# Altium PCB Archer.PcbDoc
Units mm, origin at the board's own origin, x right, y up, seen from the top; angles counter-clockwise.
Board outline 74.75 x 26.75 mm, 2 copper layers (Top Layer, Bottom Layer), stack 1.671 mm thick; 61 components, 43 nets, 220 pads, 46 vias.
Unrouted connection lines stored in the file: 3.
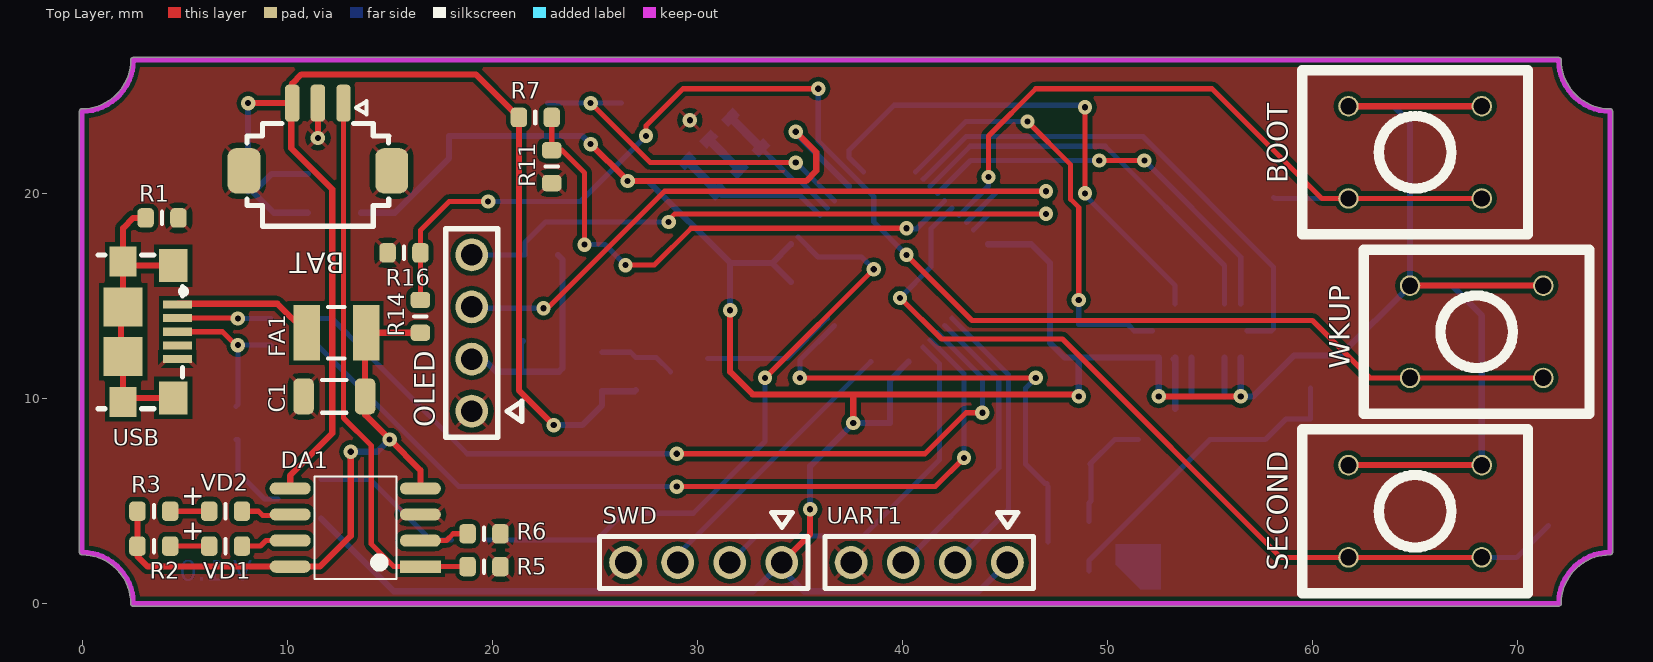
[diagram p0: Top Layer view]
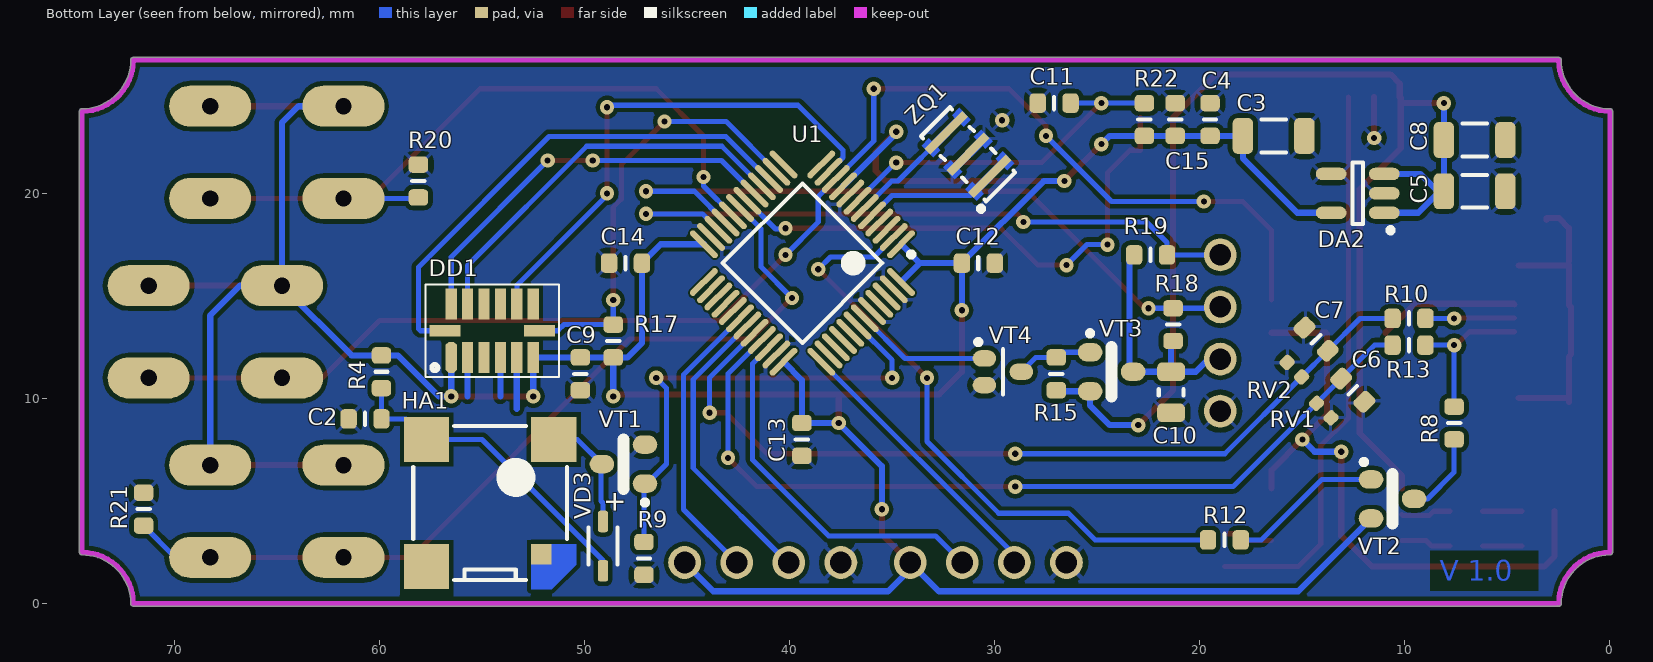
[diagram p1: Bottom Layer view, seen from below]
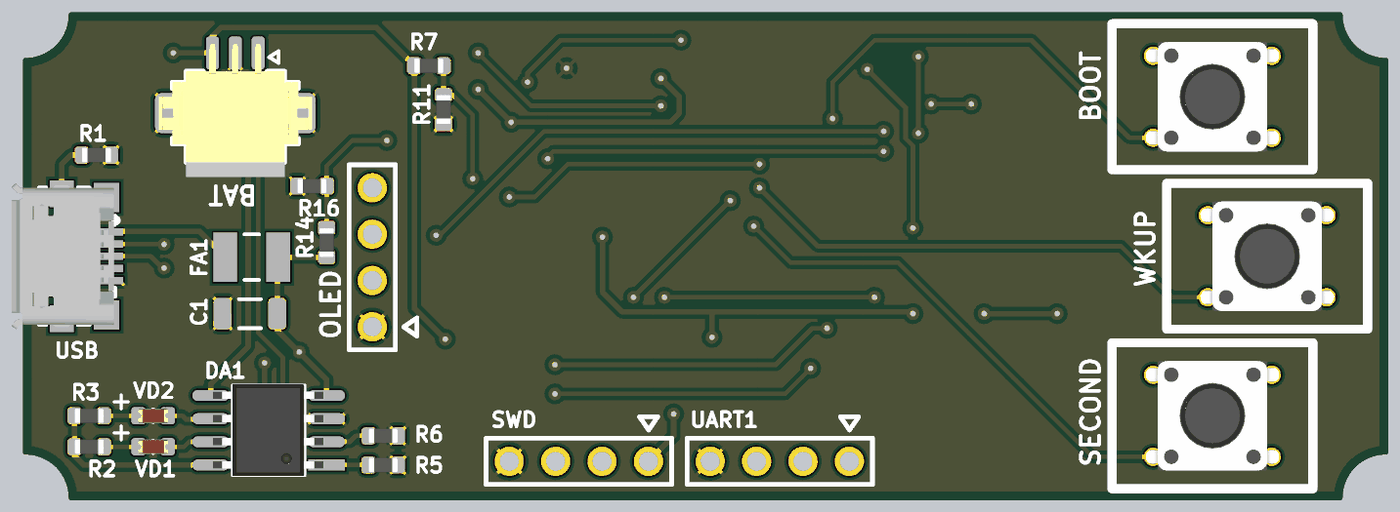
[diagram p2: 3D render of the assembled board from above, using the file's embedded part models]
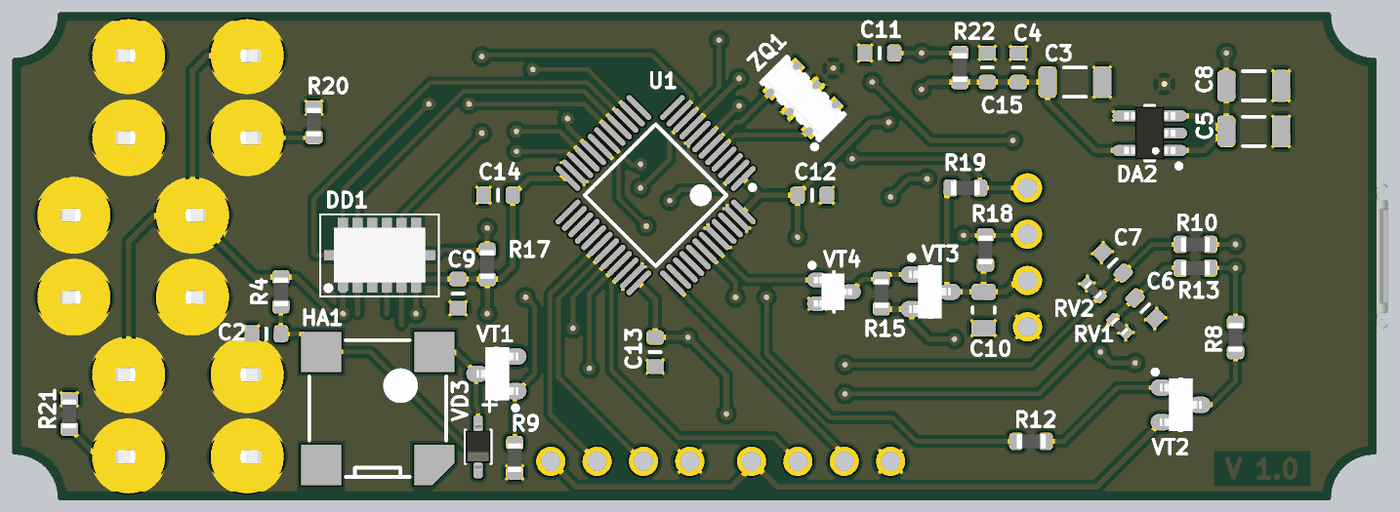
[diagram p3: 3D render of the assembled board from below, using the file's embedded part models]

## Layer stack, top to bottom
Top Solder: solder mask 0.0102, Solder Resist, Dk 3.5
Top Layer: signal copper 0.0356
Dielectric 1: dielectric 1.6, FR-4, Dk 4.8
Bottom Layer: signal copper 0.0356
Bottom Solder: solder mask 0.0102, Solder Resist, Dk 3.5

## Board outline
-0.127,2.501 ccw(c0,2.5) 0,2.373 cw(c0,0) 2.373,0 ccw(c2.5,0) 2.55,-0.117 ccw(c2.6,0) 2.6,-0.127 72,-0.127 ccw(c72,0) 72.127,0 cw(c74.5,0) 74.5,2.373 ccw(c74.5,2.5) 74.627,2.5 74.627,24 ccw(c74.5,24) 74.5,24.127 cw(c74.5,26.5) 72.127,26.5 ccw(c72,26.5) 72,26.627 2.5,26.627 ccw(c2.5,26.5) 2.373,26.5 cw(c0,26.5) 0,24.127 ccw(c0,24) -0.127,24

## Design rules (kind name [scope] priority, off if disabled: settings)
Clearance Clearance_U1_0.1mm [(ObjectKind = 'Pad') And (Component = 'U1')] p1: gap=0.1
Clearance Clearance_All_0.22mm [All] p2: gap=0.22
Clearance [All] p3: gap=0.2
ComponentClearance [All] p1 off: gap=0.05 collisioncheckmode=3 verticalgap=0.05 showdistances=FALSE
Height [All] p1 off: minheight=0 maxheight=25.4 prefheight=12
PolygonConnect [All] p1: connectstyle=Relief reliefconductorwidth=0.18 reliefentries=4 polygonreliefangle="45 Angle" airgapwidth=0.254
RoutingVias [All] p1: holewidth=0.3 width=0.7 viastyle="Through Hole" minholewidth=0.3 minwidth=0.7 maxholewidth=0.3 maxwidth=0.7
SolderMaskExpansion [All] p1: expansion=0.102
Width Width_PowerClass_0.3mm [InNetClass('PowerClass')] p1: maxlimit=0.3 minlimit=0.3 preferedwidth=0.3 minimp=50.000000 maximp=50.000000 favimp=50.000000
Width [All] p2: maxlimit=0.25 minlimit=0.25 preferedwidth=0.25 minimp=50.000000 maximp=50.000000 favimp=50.000000
28 further rules are at their usual default settings.

## Classes and differential pairs
net class PowerClass: GND NetSHLD V3.3 VBAT VBUS VCC VOLED

## Components (designator, comment, footprint, x,y, rotation, side; value= is the part's Value field where it differs from the comment)
BAT "Hirose DF13A-3P-1.25H(20)" DF13A-3P-1.25H 11.5,21.1 r180 top
BOOT "ModelName" "Button Switronic Industrial 0650HIM-130G-G high" 65,22 r180 top
C1 "чип 1206 10uF/50V," CAPC3216X135(1206) 12.3,10.1 r180 top
C2 "чип 0603 0.1uF/50V," CAPC1608X50(0603) 60.7,9 r180 bottom
C3 "чип 1206 10uF/50V," CAPC3216X135(1206) 16.4,22.8 r180 bottom
C4 "чип 0603 1uF/50V," CAPC1608X50(0603) 19.5,23.6 r270 bottom
C5 "чип 1206 10uF/50V," CAPC3216X135(1206) 6.6,20.1 r180 bottom
C6 "чип 0603 3.9pF/50V," CAPC1608X50(0603) 12.541,10.4 r225 bottom
C7 "чип 0603 3.9pF/50V," CAPC1608X50(0603) 14.328,12.887 r225 bottom
C8 "чип 1206 10uF/50V," CAPC3216X135(1206) 6.6,22.6 r180 bottom
C9 "чип 0603 0.1uF/50V," CAPC1608X50(0603) 50.2,11.2 r90 bottom
C10 "чип 0805 10uF/50V," CAPC2012X135(0805) 21.4,10.3 r90 bottom
C11 "чип 0603 0.1uF/50V," CAPC1608X50(0603) 27.1,24.4 r0 bottom
C12 "чип 0603 0.1uF/50V," CAPC1608X50(0603) 30.8,16.6 r0 bottom
C13 "чип 0603 0.1uF/50V," CAPC1608X50(0603) 39.4,8 r90 bottom
C14 "чип 0603 0.1uF/50V," CAPC1608X50(0603) 48,16.6 r180 bottom
C15 "чип 0603 0.1uF/50V," CAPC1608X50(0603) 21.2,23.6 r270 bottom
DA1 "ModelName" "Microchip NanJing Linear Battery Charger TP4056 SOP-8" 16.5,1.8 r180 top
DA2 "TPS78233DDCR(SOT23-5)" SOT95P285X130-5N(SOT23-5) 12.3,20 r0 bottom
DD1 "ModelName" "Microchip DigitalAccelerometer AnalogDevices ADXL345 LGA-14" 52,11.8 r90 bottom
FA1 "F1210 2A/" RESC1210N 12.4,13.2 r0 top
HA1 "AST7525MATRQ" AST7525MATRQ 54.6,4.9 r180 bottom
OLED "DS1021-1x4" HDRV4P254_1x4 19,17 r270 top
R1 "чип 0603 0 5%" RESC1608X45(0603) 3.9,18.8 r180 top
R2 "чип 0603 1k 5%" RESC1608X45(0603) 3.5,2.8 r180 top
R3 "чип 0603 1k 5%" RESC1608X45(0603) 3.5,4.5 r180 top
R4 "чип 0603 0 5%" RESC1608X45(0603) 59.9,11.3 r270 bottom
R5 "чип 0603 10k 5%" RESC1608X45(0603) 19.6,1.8 r180 top
R6 "чип 0603 2.8k 5%" RESC1608X45(0603) 19.6,3.4 r180 top
R7 "чип 0603 10k 5%" RESC1608X45(0603) 22.1,23.7 r180 top
R8 "чип 0603 1k 5%" RESC1608X45(0603) 7.6,8.8 r90 bottom
R9 "чип 0603 10k 5%" RESC1608X45(0603) 47.1,2.2 r90 bottom
R10 "чип 0603 10 5%" RESC1608X45(0603) 9.8,13.9 r180 bottom
R11 "чип 0603 20k 5%" RESC1608X45(0603) 22.9,21.3 r90 top
R12 "чип 0603 1k 5%" RESC1608X45(0603) 18.8,3.1 r180 bottom
R13 "чип 0603 10 5%" RESC1608X45(0603) 9.8,12.6 r180 bottom
R14 "чип 0603 5.9k 5%" RESC1608X45(0603) 16.5,14 r270 top
R15 "чип 0603 30k 5%" RESC1608X45(0603) 27,11.2 r90 bottom
R16 "чип 0603 10k 5%" RESC1608X45(0603) 15.7,17.1 r0 top
R17 "чип 0603 10k 5%" RESC1608X45(0603) 48.6,12.8 r270 bottom
R18 "чип 0603 1k 5%" RESC1608X45(0603) 21.3,13.6 r90 bottom
R19 "чип 0603 1k 5%" RESC1608X45(0603) 22.4,17 r180 bottom
R20 "чип 0603 10k 5%" RESC1608X45(0603) 58.1,20.6 r270 bottom
R21 "чип 0603 10k 5%" RESC1608X45(0603) 71.5,4.6 r270 bottom
R22 "чип 0603 1k 5%" RESC1608X45(0603) 22.7,23.6 r270 bottom
RV1 "B72590T7900V060" RESC1005X35(0402) 13.956,9.41 r45 bottom
RV2 "B72590T7900V060" RESC1005X35(0402) 15.389,11.402 r225 bottom
SECOND "ModelName" "Button Switronic Industrial 0650HIM-130G-G high" 65,4.5 r180 top
SWD "DS1021-1x4" HDRV4P254_1x4 26.5,2 r0 top
U1 "STM32F103C8T6" LQFP48_N 39.374,16.598 r315 bottom
UART1 "DS1021-1x4" HDRV4P254_1x4 37.5,2 r0 top
USB "1981568-1" "USB MICRO-B" 2,13.25 r270 top
VD1 "чип 0603 LED (RED)" LEDC1608X80N(0603)_red 7,2.8 r180 top
VD2 "чип 0603 LED (RED)" LEDC1608X80N(0603)_red 7,4.5 r180 top
VD3 "1N4148WS (SOD323)" SOD2514X110N(SOD323) 49.1,2.8 r90 bottom
VT1 "IRLML0030TRPBF (SOT-23)" "SOT95P230-3N (SOT-23) num" 48.1,6.8 r0 bottom
VT2 "BC807 (SOT-23)" "SOT95P230-3N (SOT-23)" 10.6,5.1 r180 bottom
VT3 "IRLML6402TRPBF (SOT-23)" "SOT95P230-3N (SOT-23) num" 24.3,11.3 r180 bottom
VT4 "MUN5211T1G (SOT-323)" "SOT65P200X110-3N (SOT323)_NUM" 29.6,11.3 r180 bottom
WKUP "ModelName" "Button Switronic Industrial 0650HIM-130G-G high" 68,13.25 r180 top
ZQ1 "CSTCR4M00G53Z-B0(4 MHz)" "XTAL450X200X120 (CSTCR)" 31.3,21.9 r45 bottom

## Footprints (in the part's own frame and the unit in brackets; to place one, negate y for a bottom-side part, rotate by r counter-clockwise, add the part's x,y. Pads: shape width x height; smd on the part's side, far side on the other; paste and mask are expansions set on the pad)
AST7525MATRQ [mm]
  rect 2.2x2.2 smd: 1(-3.1,3.1) 2(3.1,3.1) 3(-3.1,-3.1)
  rect 1x1 smd: 4(2.5,-2.5)
  Top Layer region: 2,-2 2,-4.2 3,-4.2 4.2,-3 4.2,-2
  silkscreen extent -3.75,-3.75 3.75,3.75, body extent -3.75,-3.75 3.75,3.75, height 2.5
"Button Switronic Industrial 0650HIM-130G-G high" [mm] "http://www.chipdip.ru/product/0650him-130g-g-tc-0103-ts-a2ps-130/"
  round 1 / inner oval 3x2 / far side oval 4x2 hole 0.8: 1(-3.25,2.25) 2(3.25,2.25) 3(3.25,-2.25) 4(-3.25,-2.25)
  silkscreen extent -5.5,-4 5.5,4, body extent -3.99,-3 3.99,3, height 12.7
CAPC1608X50(0603) [mm]
  rrect50% 0.8x0.95 smd paste-0.025: 1(-0.8,0) 2(0.8,0)
  silkscreen extent 0,-0.3 0,0.3, body extent -0.8,-0.4 0.8,0.4, height 0.5
CAPC2012X135(0805) [mm]
  rrect50% 0.9x1.35 smd paste-0.025: 1(-1,0) 2(1,0)
  silkscreen extent -0.15,-0.6 0.15,0.6, body extent -1,-0.6 1,0.6, height 1.35
CAPC3216X135(1206) [mm]
  rrect50% 1x1.75 smd paste-0.025: 1(-1.5,0) 2(1.5,0)
  silkscreen extent -0.6,-0.8 0.6,0.8, body extent -1.6,-0.8 1.6,0.8, height 1.35
DF13A-3P-1.25H [mm] "1.25mm Pitch Crimping Connector"
  rrect50% 0.7x1.8 smd: 1(-1.25,-3.3) 2(0,-3.3) 3(1.25,-3.3)
  rrect50% 1.6x2.2 smd: SH1(-3.6,0) SH2(3.6,0)
  silkscreen extent -3.45,-3.4 3.45,2.7, body extent -4.2,-3.8 4.2,3.5, height 3.61
HDRV4P254_1x4 [mm] "PLS4"
  round 1.6 hole 1.05: 1(7.62,0) 2(5.08,0) 3(2.54,0) 4(0,0)
  silkscreen extent -1.27,-1.27 8.89,2.45
LEDC1608X80N(0603)_red [mm]
  rrect50% 0.8x0.95 smd: A(0.8,0) C(-0.8,0)
  silkscreen extent 0,-0.35 0,0.35, body extent -0.81,-0.4 0.81,0.4, height 0.6
LQFP48_N [mm] "Thin QFP, 48-Leads, Body 7x7mm, Pitch 0.5mm, IPC Medium Density"
  oval 1.8x0.3 smd: 1(-4.05,2.75) 2(-4.05,2.25) 3(-4.05,1.75) 4(-4.05,1.25) 5(-4.05,0.75) 6(-4.05,0.25) 7(-4.05,-0.25) 8(-4.05,-0.75) 9(-4.05,-1.25) 10(-4.05,-1.75) 11(-4.05,-2.25) 12(-4.05,-2.75) 25(4.05,-2.75) 26(4.05,-2.25) 27(4.05,-1.75) 28(4.05,-1.25) 29(4.05,-0.75) 30(4.05,-0.25) 31(4.05,0.25) 32(4.05,0.75) 33(4.05,1.25) 34(4.05,1.75) 35(4.05,2.25) 36(4.05,2.75)
  oval 0.3x1.8 smd: 13(-2.75,-4.05) 14(-2.25,-4.05) 15(-1.75,-4.05) 16(-1.25,-4.05) 17(-0.75,-4.05) 18(-0.25,-4.05) 19(0.25,-4.05) 20(0.75,-4.05) 21(1.25,-4.05) 22(1.75,-4.05) 23(2.25,-4.05) 24(2.75,-4.05) 37(2.75,4.05) 38(2.25,4.05) 39(1.75,4.05) 40(1.25,4.05) 41(0.75,4.05) 42(0.25,4.05) 43(-0.25,4.05) 44(-0.75,4.05) 45(-1.25,4.05) 46(-1.75,4.05) 47(-2.25,4.05) 48(-2.75,4.05)
  silkscreen extent -4.17,-2.75 2.75,3.57, body extent -3.5,-3.5 3.5,3.5, height 1.6
"Microchip DigitalAccelerometer AnalogDevices ADXL345 LGA-14" [mm]
  oct 1.5x0.55 smd mask+0: 1(0.2,4.5)
  rect 1.5x0.55 smd mask+0: 2(0.2,3.7) 3(0.2,2.9) 4(0.2,2.1) 5(0.2,1.3) 6(0.2,0.5) 8(2.8,0.5) 9(2.8,1.3) 10(2.8,2.1) 11(2.8,2.9) 12(2.8,3.7) 13(2.8,4.5)
  rect 0.55x1.5 smd mask+0: 7(1.5,0.2) 14(1.5,4.8)
  silkscreen extent -0.75,-0.75 3.75,5.75, body extent 0.01,0 3.01,5, height 1.03
"Microchip NanJing Linear Battery Charger TP4056 SOP-8" [mm]
  rect 2x0.6 smd: 1(0,0)
  oval 2x0.6 smd: 2(0,-1.27) 3(0,-2.54) 4(0,-3.81) 5(6.35,-3.81) 6(6.35,-2.54) 7(6.35,-1.27) 8(6.35,0)
  silkscreen extent 1.18,-4.4 5.18,0.6, body extent 0.18,-4.42 6.22,0.6, height 1.6
RESC1005X35(0402) [mm]
  rrect50% 0.6x0.65 smd paste-0.025: 1(-0.5,0) 2(0.5,0)
  body extent -0.5,-0.25 0.5,0.25, height 0.38
RESC1210N [mm] "Chip Resistor, Body 3.2x2.5mm, IPC Medium Density"
  rect 1.3x2.7 smd: 1(-1.45,0) 2(1.45,0)
  silkscreen extent -0.4,-1.25 0.4,1.25, body extent -1.68,-1.32 1.68,1.32, height 0.71
RESC1608X45(0603) [mm]
  rrect50% 0.8x0.95 smd paste-0.025: 1(-0.8,0) 2(0.8,0)
  silkscreen extent 0,-0.3 0,0.3, body extent -0.8,-0.4 0.8,0.4, height 0.5
SOD2514X110N(SOD323) [mm]
  rrect50% 1.05x0.5 smd: A(1.2,0) C(-1.2,0)
  silkscreen extent -0.9,-0.7 0.9,0.7, body extent -1.3,-0.67 1.3,0.68, height 1.1
"SOT65P200X110-3N (SOT323)_NUM" [mm]
  oval 1.15x0.8 smd: 1(-0.9,0.65) 2(-0.9,-0.65) 3(0.9,0)
  silkscreen extent -1.33,-1.1 0,1.57, body extent -1.1,-1 1,1, height 0.95
"SOT95P230-3N (SOT-23)" [mm]
  oval 1.2x0.9 smd: b(-1.05,0.95) c(1.05,0) e(-1.05,-0.95)
  silkscreen extent -1.52,-1.2 0,1.92, body extent -1.15,-1.45 1.15,1.45, height 1
"SOT95P230-3N (SOT-23) num" [mm]
  oval 1.2x0.9 smd: 1(-1.05,0.95) 2(-1.05,-0.95) 3(1.05,0)
  silkscreen extent -1.17,-1.2 0,2, body extent -1.2,-1.45 1.1,1.45, height 1
SOT95P285X130-5N(SOT23-5) [mm]
  oval 1.5x0.6 smd: 1(-1.295,0.95) 2(-1.295,0) 3(-1.295,-0.95) 4(1.295,-0.95) 5(1.295,0.95)
  silkscreen extent -1.72,-1.5 0.25,1.92, body extent -1.4,-1.45 1.4,1.45, height 1.45
"USB MICRO-B" [mm] "Micro USB B Tyco  1981568-1"
  rect 0.4x1.4 smd: 1(-1.325,2.65) 2(-0.675,2.65) 3(0,2.65) 4(0.675,2.65) 5(1.325,2.65)
  rect 1.45x1.3 smd: SHLD(-3.425,0) SHLD(3.425,0)
  rect 1.6x1.4 smd: SHLD(-3.225,2.45) SHLD(3.225,2.45)
  rect 1.9x1.9 smd: SHLD(-1.2,0) SHLD(1.2,0)
  silkscreen extent -3.75,-1.22 3.75,3.12, body extent -4,-2.75 4,2.85, height 2.79
"XTAL450X200X120 (CSTCR)" [mm] "Ceramic Resonators CSTCR_G15C"
  rect 0.4x2.6 smd: 1(-1.5,0) 2(0,0) 3(1.5,0)
  Top Layer region: -1.9,1.3 -1.9,0.8 -1.7,0.8 -1.7,-0.8 -1.9,-0.8 -1.9,-1.3 -1.1,-1.3 -1.1,-0.8 -1.3,-0.8 -1.3,0.8 -1.1,0.8 -1.1,1.3
  Top Layer region: -0.4,1.3 -0.4,0.8 -0.2,0.8 -0.2,-0.8 -0.4,-0.8 -0.4,-1.3 0.4,-1.3 0.4,-0.8 0.2,-0.8 0.2,0.8 0.4,0.8 0.4,1.3
  Top Layer region: 1.1,1.3 1.1,0.8 1.3,0.8 1.3,-0.8 1.1,-0.8 1.1,-1.3 1.9,-1.3 1.9,-0.8 1.7,-0.8 1.7,0.8 1.9,0.8 1.9,1.3
  silkscreen extent -2.37,-1 2.25,1.47, body extent -2.25,-1 2.25,1, height 1.15

## Part data
BAT: library part DF13C-3P-1.25_(**), "Crimping Connector 3p"
BOOT SECOND WKUP: library part "Button Switronic Industrial 0650HIM-130G-G high", "Кнопка тактовая без фиксации"
C1 C3 C5 C8: library part C1206, "C1206"
C2 C4 C6 C7 C9 C11 C12 C13 C14 C15: library part C0603, "C0603"
C10: library part C0805, "C0805"
DA1: library part "Microchip NanJing Linear Battery Charger TP4056 SOP-8", "DESCRIPTION  The TP4056 is a complete constant-current/constant-voltage linear charger for single cell  lithium-ion batteries. Its SOP package and low external component count make the TP4056  ideally suited for portable applications. Furthermore, the TP4056 can work within USB and wall  adapter."
DA2: library part TPS76333DBV, "TPS76333DBV"
DD1: library part "Microchip DigitalAccelerometer AnalogDevices ADXL345 LGA-14", "GENERAL DESCRIPTION  The ADXL345 is a small, thin, ultralow power, 3-axis accelerometer  with high resolution (13-bit) measurement at up to ±16 g. Digital  output data is formatted as 16-bit twos complement and is accessible through either a SPI (3- or 4-wire) or I2C digital interface."
FA1: library part "FUSE 1210", "FUSE 1210"
HA1: "Transducer (Electro-Mech)"
OLED SWD UART1: library part Header-2.54P-4N, "IDC разъем 4 контактов. Шаг 2.54мм"
R1 R2 R3 R4 R5 R6 R7 R8 R9 R10 R11 R12 R13 R14 R15 R16 R17 R18 R19 R20 R21 R22: library part R0603, "R0603"
U1: "STM32 ARM-based 32-bit MCU with 64 Kbytes Flash, 48-pin LQFP, Industrial Temperature"
USB: library part "USB Micro-B Tyco", "USB micro type A. SMT (TE 1981568-1)"
VD1 VD2: library part "LED 0603", "LED 0603"
VD3: library part BAT54WS, "BAT54WS"
VT1: library part IRLML0030, "HEXFET Power MOSFET"
VT2: library part BC807, "BC807"
VT3: library part IRLML6402, "IRLML6402"
VT4: library part MUN5211T1G, "MUN5211T1"
ZQ1: library part "XTAL, SMD, 4.5mm x 2mm, 3 pads", "CSTCR_G15C Ceramic Resonators"

## Via types
v1: diameter 0.7, hole 0.3, Top Layer to Bottom Layer, tented both sides, 46 vias

## Nets (pads, with @x,y where several pads share a name; then routed paths per layer and width w, separated by ;. In a path a pad name is that pad's centre, name@x,y a point inside that pad or via, vN(x,y) a via of type N, cw(c..) or ccw(c..) an arc to the next point about the centre after c; other vN are vias at no path point)
ACCEL_CS: DD1.7 R17.1 U1.14 | length 21.1
  Top Layer w0.25: v1(46.1,23.5) 48.205,21.395 48.205,19.712 48.6,19.317 v1(48.6,14.8)
  Bottom Layer w0.25: U1.14 43.094,23.5 v1(46.1,23.5) ; v1(48.6,14.8) R17.1 51,13.6 51.3,13.3 DD1.7
ACCEL_INT1: DD1.9 U1.11 | length 25
  Top Layer w0.25: v1(48.9,20) v1(48.9,24.2)
  Bottom Layer w0.25: U1.11 37.4,21.754 37.4,22.1 39.595,24.295 v1@48.6,24.295 ; v1(48.9,20) 48.8,20 53.3,15.5 DD1.9
ACCEL_SCL: DD1.14 U1.15 | length 24.9
  Bottom Layer w0.25: U1.15 41.042,20.699 43.108,22.765 51.735,22.765 58.1,16.4 58.1,13.4 58,13.3 DD1.14
ACCEL_SDA: DD1.13 U1.17 | length 19.7
  Top Layer w0.25: v1(49.6,21.6) v1(51.8,21.6)
  Bottom Layer w0.25: U1.17 43.315,21.6 v1(49.6,21.6) ; v1(51.8,21.6) 56.5,16.9 DD1.13
ACCEL_SDO: DD1.12 U1.16 | length 19.4
  Bottom Layer w0.25: U1.16 43.303,22.295 49.888,22.295 55.7,16.483 DD1.12
BAT_MEAS: R7.1 R11.2 U1.18 | length 26.5
  Top Layer w0.25: R7.1 R11.2 23.4,22.1 24.5,21 v1(24.5,17.5) ; v1(26.5,16.5) 27.9,16.5 29.7,18.3 v1(40.2,18.3)
  Bottom Layer w0.25: v1(24.5,17.5) 25.5,17.5 v1(26.5,16.5) ; v1(40.2,18.3) 40.24,18.26 40.682,18.26 U1.18
BUT_BOOT: BOOT.1 BOOT.2 R20.2 U1.20 | length 35.4
  Top Layer w0.25: v1(44.2,20.8) 44.2,22.8 46.5,25.1 55.1,25.1 60.45,19.75 BOOT.2 BOOT.1
  Bottom Layer w0.25: U1.20 44.2,20.364 v1(44.2,20.8) ; R20.2 58.15,19.75 BOOT.2
BUT_SECOND: R21.2 SECOND.1 SECOND.2 U1.19 | length 42.9
  Top Layer w0.25: v1(39.883,14.9) 39.9,14.9 41.9,12.9 47.8,12.9 58.45,2.25 SECOND.2 SECOND.1
  Bottom Layer w0.25: v1(39.883,14.9) 41.4,16.417 41.4,18.271 U1.19 ; SECOND.1 69.95,2.25 R21.2
BUZZER: R9.2 U1.42 VT1.1 | length 23.3
  Top Layer w0.25: v1(35,11) v1(46.5,11)
  Bottom Layer w0.25: v1(35,11) 35,11.871 U1.42 ; v1(46.5,11) 46,10.5 46,6.8 46.95,5.85 VT1.1 ; R9.2 VT1.1@47.1,5.7
D1+: R8.2 R13.2 USB.3 | length 7.9
  Top Layer w0.25: USB.3 6.85,13.25 7.5,12.6 v1(7.6,12.6)
  Bottom Layer w0.25: R8.2@7.5,9.6 7.6,9.7 v1(7.6,12.6) R13.2@9.2,12.6
D1-: R10.2 USB.2 | length 4.9
  Top Layer w0.25: USB.2 7.775,13.925 7.75,13.9 v1(7.6,13.9)
  Bottom Layer w0.25: v1(7.6,13.9) R10.2@9.2,13.9
D2+: C6.1 R13.1 RV1.2 U1.33 | length 42.5
  Top Layer w0.25: v1@28.8,5.7 v1(29,5.7) 41.6,5.7 v1(43,7.1)
  Bottom Layer w0.25: R13.1 11.473,12.6 C6.1 RV1.2 18.373,5.7 v1(29,5.7) ; U1.33 43,11.204 v1(43,7.1)
D2-: C7.2 R10.1 RV2.2 U1.32 | length 41.7
  Top Layer w0.25: v1(29,7.3) 41.1,7.3 43.1,9.3 v1(43.9,9.3)
  Bottom Layer w0.25: R10.1 12.184,13.9 C7.2 RV2.2 18.784,7.3 v1(29,7.3) ; U1.32 43.9,11.011 v1(43.9,9.3)
GND: BAT.2 BAT.SH1 BAT.SH2 C1.2 C2.1 C3.2 C4.1 C5.2 C6.2 C7.1 C8.2 C9.1 C10.1 C11.2 C12.1 C13.1 C14.1 C15.1 DA1.3 DA2.2 DA2.4 DD1.2 DD1.4 DD1.5 OLED.1 R1.1 R5.1 R6.1 R9.1 R11.1 R16.1 R20.1 R21.1 RV1.1 RV2.1 SWD.4 U1.8 U1.23 U1.35 U1.44 U1.47 UART1.4 USB.5 VT1.2 VT4.2 ZQ1.2 | length 8.4
  Top Layer w0.3: v1(11.5,22.7) BAT.2@11.5,24.7
  Bottom Layer w0.3: DD1.5@53.22,11.92 DD1.5 53.3,9.5 ; 54.1,10.1 DD1.4 ; 55.7,10.1 DD1.2
  other v1: 29.636,23.564
NetC2_2: C2.2 HA1.1 R4.2 VD3.C | length 15.7
  Bottom Layer w0.25: VD3.C 49.1,2.1 55,8 HA1.1 58.7,9 C2.2 R4.2
NetC11_1: C11.1 R22.1 U1.7 | length 17.5
  Top Layer w0.25: v1(24.8,24.4) 27.7,21.5 v1(34.8,21.5)
  Bottom Layer w0.25: R22.1 v1(24.8,24.4) C11.1 ; v1(34.8,21.5) 34.825,21.5 U1.7
NetDA1_6: DA1.6 VD2.C | length 2.4
  Top Layer w0.25: VD2.C 8.6,4.5 8.8,4.3 10.11,4.3 DA1.6
NetDA1_7: DA1.7 VD1.C | length 2.5
  Top Layer w0.25: VD1.C 8.7,2.8 8.97,3.07 DA1.7
NetHA1_2: HA1.2 VD3.A VT1.3 | length 5.7
  Bottom Layer w0.25: VD3.A 49.1,4.9 49.2,5 49.2,6.75 VT1.3 50.35,8 HA1.2
NetOLED_3: OLED.3 R18.2 U1.21 | length 34.9
  Top Layer w0.25: v1(22.5,14.4) 22.7,14.4 28.4,20.1 v1(47,20.1)
  Bottom Layer w0.25: OLED.3 19.06,14.4 21.5,14.4 v1(22.5,14.4) ; U1.21 44.644,20.1 v1(47,20.1)
NetOLED_4: OLED.4 R19.2 U1.22 | length 33.1
  Top Layer w0.25: v1(28.6,18.6) 28.6,18.7 28.9,19 v1(47,19)
  Bottom Layer w0.25: OLED.4 R19.2 21.6,17.6 22.6,18.6 v1(28.6,18.6) ; U1.22 44.251,19 v1(47,19)
NetR2_1: R2.1 VD1.A | length 1.9
  Top Layer w0.25: R2.1 VD1.A
NetR3_1: R3.1 VD2.A | length 1.9
  Top Layer w0.25: R3.1 VD2.A
NetR8_1: R8.1 VT2.c | length 4.2
  Bottom Layer w0.25: R8.1@7.5,8 R8.1@7.6,7.9 ; R8.1 R8.1@7.6,7.9 ; VT2.c 8.9,5.1 7.6,6.4 R8.1@7.6,7.9
NetR12_2: R12.2 VT2.b | length 7.6
  Bottom Layer w0.25: VT2.b 14.05,6.05 17,3.1 R12.2
NetR15_2: R15.2 VT3.1 VT4.3 | length 3.7
  Bottom Layer w0.25: VT3.1 26.75,12.25 R15.2 28,12 VT4.3
NetSHLD: R1.2 USB.SHLD | length 14.4
  Top Layer w0.3: USB.SHLD@1.9,12.15 1.9,14.45 2,14.55 USB.SHLD@2,16.5 ; USB.SHLD@2,9.825 USB.SHLD@2,12.05 ; USB.SHLD@2,16.675 2,18.3 2.5,18.8 R1.2@3,18.8 ; USB.SHLD@2.025,16.475 USB.SHLD@4.45,16.475 ; USB.SHLD@2.2,10.025 USB.SHLD@4.45,10.025 ; R1.2@3.1,18.7 R1.2@3,18.8 ; R1.2 R1.2@3,18.8
NetU1_5: U1.5 ZQ1.1 | length 6.5
  Bottom Layer w0.25: ZQ1.1 31.179,19.9 35.011,19.9 U1.5
NetU1_6: U1.6 ZQ1.3 | length 5.5
  Bottom Layer w0.25: ZQ1.3 32.361,22.956 34.717,20.6 35.018,20.6 U1.6
PROG: DA1.2 R6.2 | length 2.4
  Top Layer w0.25: DA1.2 17.77,3.07 18.1,3.4 R6.2
PWR_OLED: U1.43 VT4.1 | length 6.6
  Bottom Layer w0.25: VT4.1 34.372,11.95 U1.43
RX: U1.31 UART1.3 | length 14.6
  Bottom Layer w0.25: UART1.3 40.1,2 44.7,6.6 44.7,10.918 U1.31
SWCLK: SWD.3 U1.37 | length 13.7
  Bottom Layer w0.25: SWD.3 29.04,2.375 U1.37
SWDIO: SWD.2 U1.34 | length 18.1
  Bottom Layer w0.25: SWD.2 32.88,3.3 38.1,3.3 41.8,7 41.8,11.697 U1.34
TEMP: BAT.1 DA1.1 R5.2 | length 27.5
  Top Layer w0.25: BAT.1@12.75,24.7 12.755,24.695 12.755,9.045 14.1,7.7 14.1,2.9 15.2,1.8 DA1.1 R5.2
TX: U1.30 UART1.2 | length 14.1
  Bottom Layer w0.25: U1.30 45.17,11.155 45.17,4.59 UART1.2
USB-M: R12.1 U1.2 | length 30.6
  Top Layer w0.25: v1(33.3,11) v1(38.6,16.3)
  Bottom Layer w0.25: R12.1 25.1,3.1 26.4,4.4 29.8,4.4 33.3,7.9 v1(33.3,11) ; U1.2 35.89,16.9 38,16.9 v1(38.6,16.3)
V3.3: BOOT.3 BOOT.4 C3.1 C4.2 C9.2 C12.2 C13.2 C14.2 C15.2 DA2.5 DD1.1 DD1.6 R4.1 R17.2 R22.2 SECOND.3 SECOND.4 SWD.1 U1.1 U1.9 U1.24 U1.36 U1.48 UART1.1 VT2.e WKUP.3 WKUP.4 | length 192.8
  Top Layer w0.3: v1(24.8,22.4) 26.5,20.7 26.5,20.6 v1(26.6,20.6) 35.3,20.6 35.8,21.1 35.8,22 v1(34.8,23) ; v1(31.6,14.3) 31.6,11.3 32.7,10.2 37.6,10.2 ; SWD.1 35.5,3.38 v1(35.5,4.6) ; v1(37.6,8.8) 37.6,10.2 ; v1(48.6,10.1) 48.6,10.2 37.6,10.2 ; v1(52.5,10.1) v1(56.5,10.1) ; SECOND.3 SECOND.4 ; BOOT.3 BOOT.4 ; WKUP.3 WKUP.4
  Bottom Layer w0.3: VT2.e 15.2,0.6 32.72,0.6 SWD.1 34.12,1.68 35.2,0.6 43.72,0.6 UART1.1 ; DA2.5 15.25,19.05 17.9,21.7 C3.1 C4.2 C15.2 R22.2 24.4,22.8 v1(24.8,22.4) ; v1(26.6,20.6) 27.618,20.6 31.6,16.618 C12.2 ; v1(31.6,14.3) C12.2 ; U1.48 33.648,16.596 33.648,16.6 ; U1.1 33.648,16.6 ; v1@34.8,22.939 U1.9 ; v1(35.5,4.6) 35.5,6.7 v1(37.6,8.8) C13.2 39.4,10.897 U1.36 ; U1.24 46.283,17.517 C14.2 47.2,12.7 47.9,12 R17.2 ; v1(48.6,10.1) R17.2 ; v1(52.5,10.1) DD1.6 C9.2 R17.2 ; DD1.1 v1(56.5,10.1) 57.1,10.1 59.1,12.1 R4.1 61.35,12.1 WKUP.3 ; BOOT.3 63.95,24.25 64.75,23.45 WKUP.3 ; SECOND.4 68.25,14.05 66.8,15.5 WKUP.3 ; BOOT.4 BOOT.4@68.35,24.25 ; C12.2 33.648,16.6
VBAT: BAT.3 C5.1 C8.1 DA1.5 DA2.1 DA2.3 R7.2 R15.1 VT3.2 | length 67.2
  Top Layer w0.3: v1(8.1,24.4) BAT.3@10.2,24.4 ; DA1.5 10.15,6.25 12.2,8.3 12.2,20.2 10.2,22.2 BAT.3@10.2,24.65 ; BAT.3@10.25,24.7 10.25,25.35 10.7,25.8 19.2,25.8 R7.2 21.3,10.4 v1(23,8.7)
  Bottom Layer w0.3: C5.1 C5.1@8.1,20.2 ; v1(8.1,24.4) C8.1 C5.1@8.1,20.2 ; DA2.1 9.35,19.05 C5.1@8.2,20.2 ; DA2.3 9.25,20.95 8.5,20.2 C5.1@8.2,20.2 ; v1(23,8.7) 24.4,8.7 25.35,9.65 VT3.2 26.95,10.35 R15.1 ; C5.1@8.1,20.2 C5.1@8.2,20.2
VBUS: FA1.1 USB.1 | length 6.9
  Top Layer w0.3: USB.1 4.695,14.62 9.53,14.62 FA1.1
VCC: C1.1 DA1.4 DA1.8 FA1.2 R2.2 R3.2 R14.2 | length 31.1
  Top Layer w0.3: R3.2 R2.2 2.7,2.3 3.2,1.8 DA1.8 11.6,1.8 13.1,3.3 v1(13.1,7.4) ; DA1.4 16.5,6.5 v1(15,8) 13.8,9.2 C1.1 13.8,13.15 FA1.2 R14.2
  Bottom Layer w0.3: v1(13.1,7.4) 14.4,7.4 v1(15,8)
VOLED: C10.2 OLED.2 R18.1 R19.1 VT3.3 | length 11.9
  Bottom Layer w0.3: OLED.2 19.58,11.92 20.2,11.3 C10.2 ; R18.1@21.5,12.8 21.4,12.7 21.4,12.35 21.4,11.65 C10.2 ; R19.1 23.42,16.78 23.42,11.47 VT3.3 C10.2
WKUP: R14.1 R16.2 U1.10 WKUP.1 WKUP.2 | length 69.4
  Top Layer w0.25: R14.1 R16.2 16.5,18.2 17.9,19.6 v1(19.8,19.6) ; v1(27.5,22.8) 27.5,23.3 29.3,25.1 v1(35.9,25.1) ; v1(40.2,17) 43.4,13.8 60,13.8 62.8,11 WKUP.2 WKUP.1
  Bottom Layer w0.25: v1(19.8,19.6) 24.3,19.6 v1(27.5,22.8) ; v1(35.9,25.1) 35.9,22.546 U1.10 38.6,19.846 38.6,18.6 v1(40.2,17)
pads on no net: DD1.3 DD1.8 DD1.10 DD1.11 HA1.3 HA1.4 U1.3 U1.4 U1.12 U1.13 U1.25 U1.26 U1.27 U1.28 U1.29 U1.38 U1.39 U1.40 U1.41 U1.45 U1.46 USB.4

## Polygon pours and split planes (outlines as drawn)
GND on Bottom Layer "Top Layer-No Net" (solid, remove dead copper, pour order 14): -1,27 75,27 75,-1 -1,-1
GND on Top Layer "Top Layer-No Net" (solid, remove dead copper, pour order 16): -1,27 75,27 75,-1 -1,-1

## Keep-outs
Keep-Out Layer:
  lines w0.254: 2.5,0 ccw(c0,0) 0,2.5 0,24 ccw(c0,26.5) 2.5,26.5 72,26.5 ccw(c74.5,26.5) 74.5,24 74.5,2.5 ccw(c74.5,0) 72,0 2.6,0

## Other copper
Bottom Layer:
  text "V 1.0" at 8.3,1.1 h1

## Text inside footprints (layer, text, board x,y; h text height)
OLED: Mechanical 1 "1" at 20.56,8.51 h1 r270; Mechanical 1 "4" at 20.57,17.62 h1 r270
SWD: Mechanical 1 "4" at 25.88,3.57 h1; Mechanical 1 "1" at 34.99,3.56 h1
UART1: Mechanical 1 "4" at 36.88,3.57 h1; Mechanical 1 "1" at 45.99,3.56 h1
USB: Mechanical 1 "PCB EDGE" at 0.65,16.7 h0.4 r270
VD1: Top Overlay "+" at 5.975,3.95 h1 r180; Mechanical 1 "+" at 5.975,3.95 h1 r180
VD2: Top Overlay "+" at 5.975,5.65 h1 r180; Mechanical 1 "+" at 5.975,5.65 h1 r180
VD3: Mechanical 1 "+" at 48.075,4.375 h1 r270; Bottom Overlay "+" at 48.075,4.375 h1 r270